# Altium PCB PCB_assembly_drawing_try2.PcbDoc (part 4 of 5)
Units mm, origin at the board's own origin, x right, y up, seen from the top; angles counter-clockwise.
Board outline 187.5 x 240 mm, 2 copper layers (Top Layer, Bottom Layer), stack 2.8 mm thick; 485 components, 419 nets, 1569 pads, 683 vias.
Unrouted connection lines stored in the file: 11.
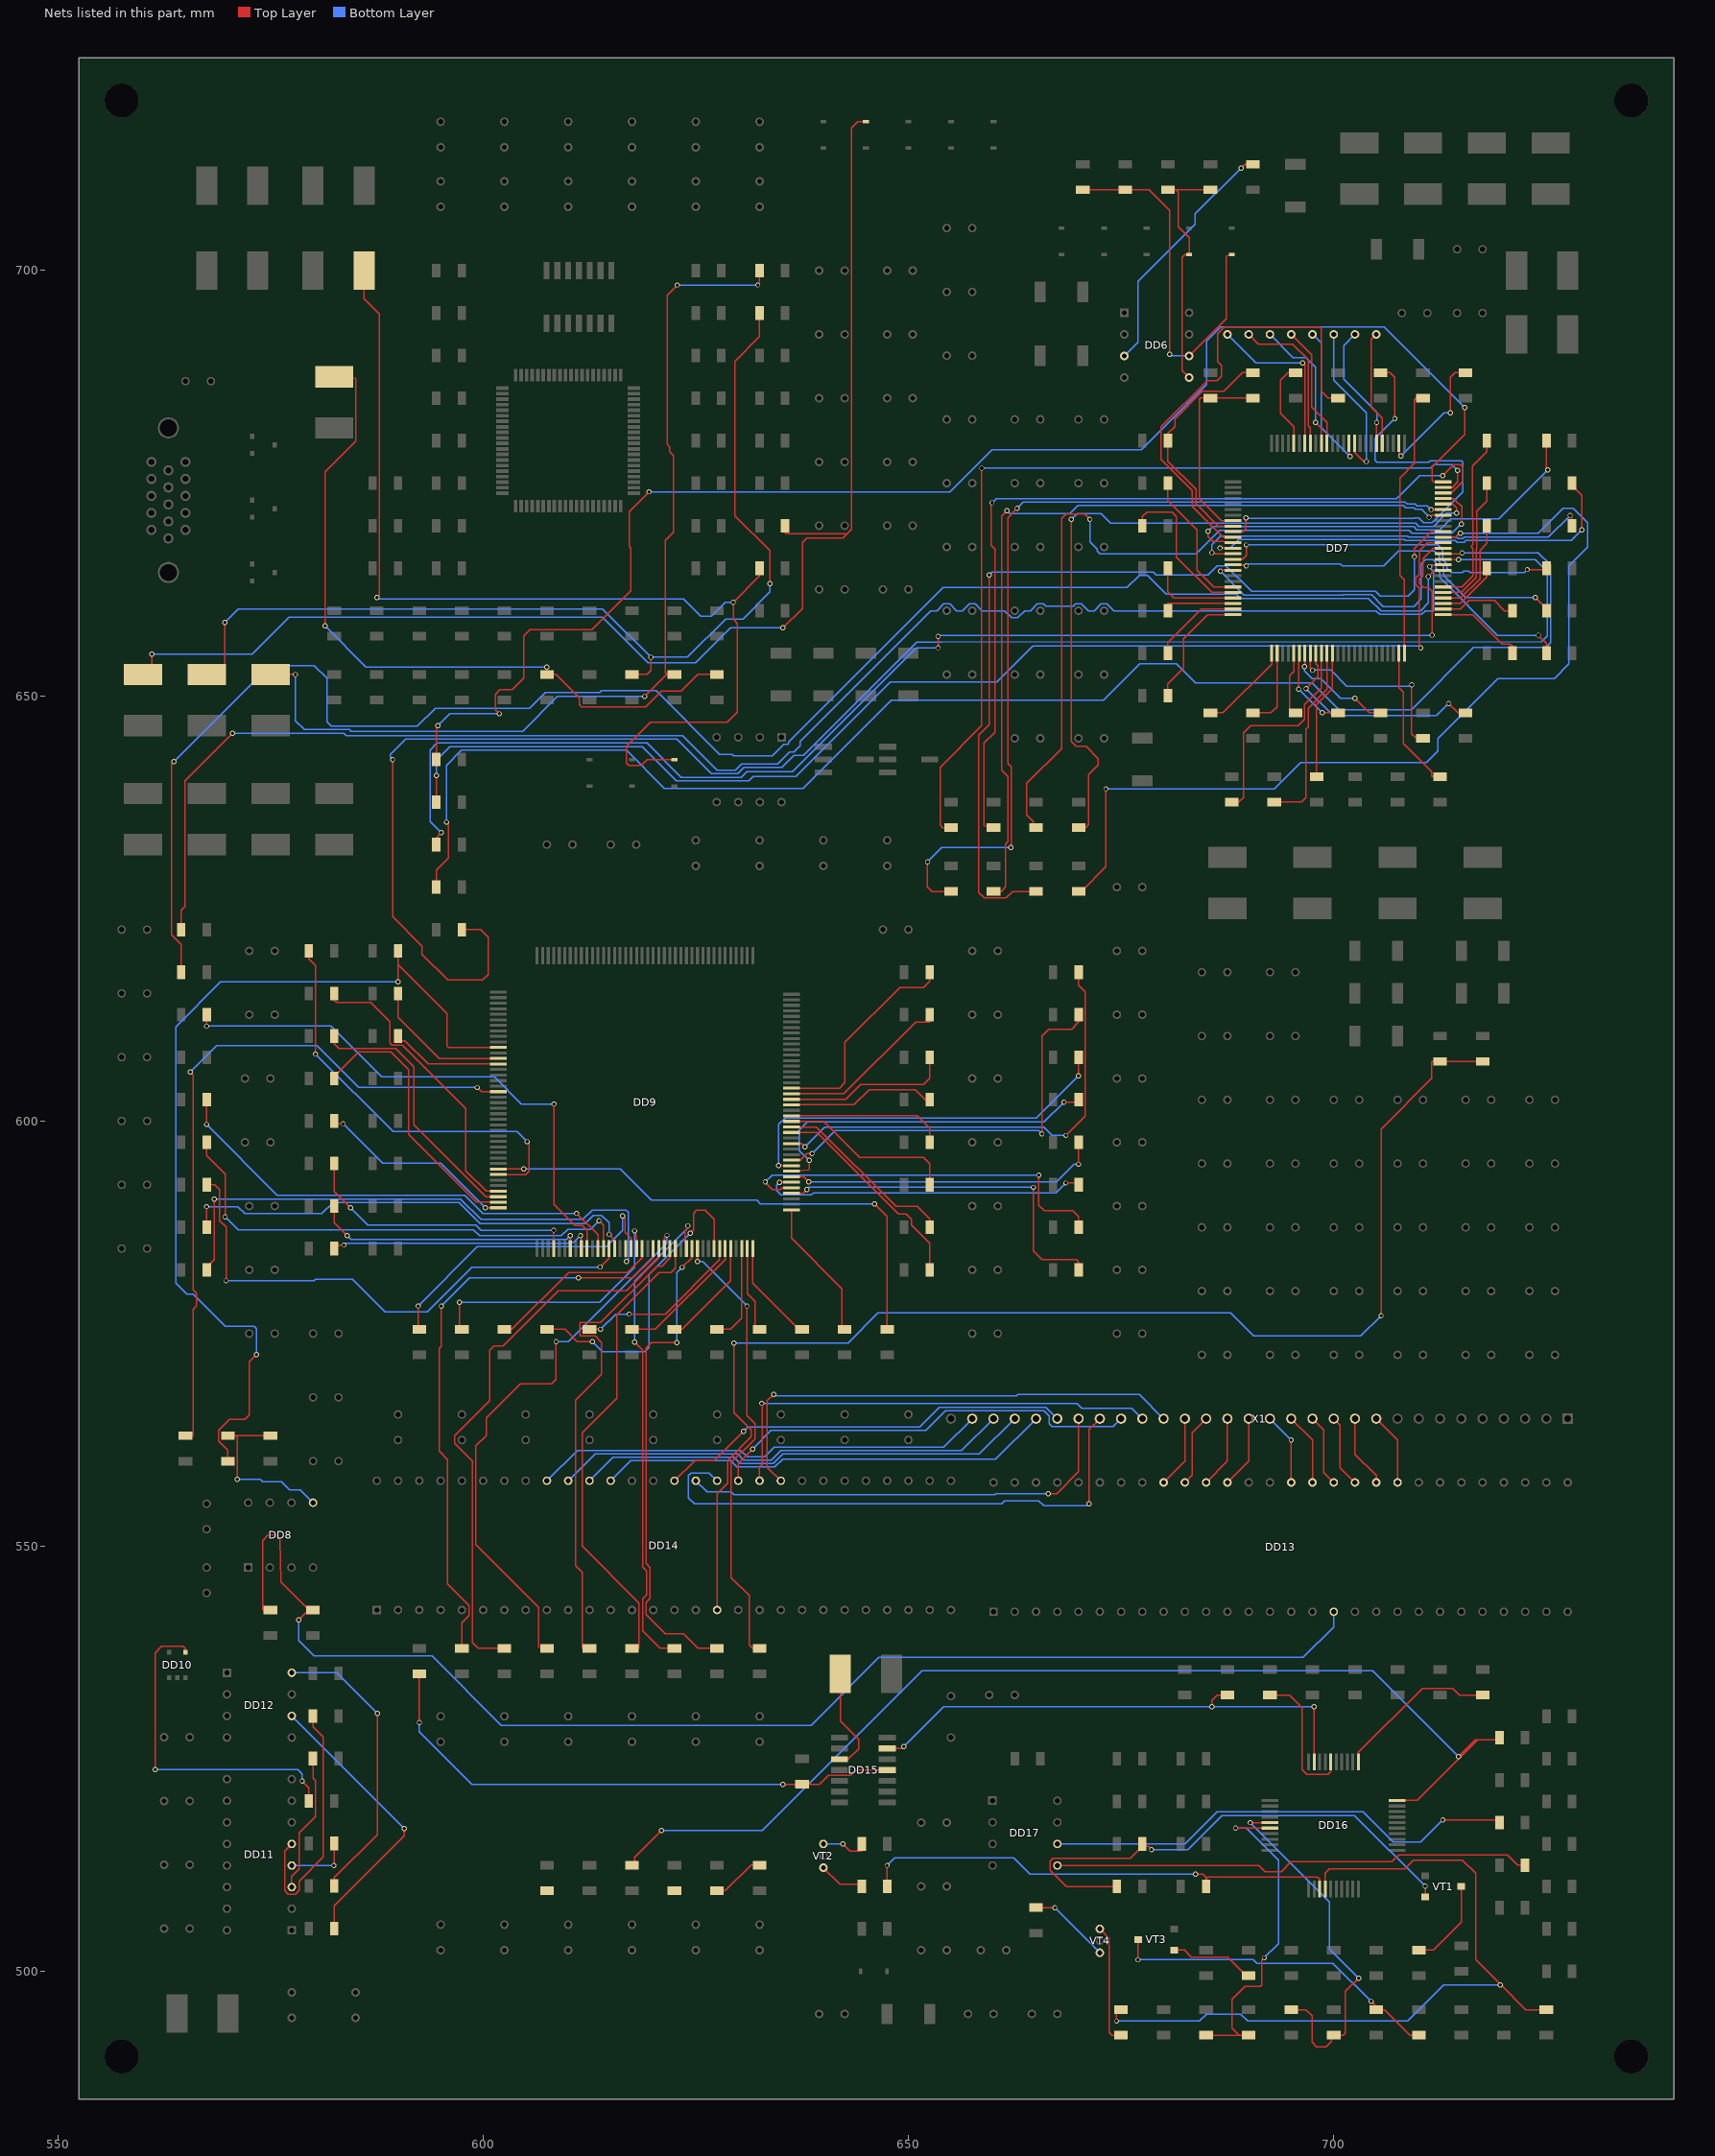
[diagram p4: the nets of this part, all layers, seen from the top]

## Via types
v1: diameter 0.6, hole 0.4, Top Layer to Bottom Layer, 677 vias
v2: diameter 0.5, hole 0.4, Top Layer to Bottom Layer, 3 vias
v3: diameter 0.4, hole 0.4, Top Layer to Bottom Layer, 2 vias
v4: diameter 0.6, hole 0.3, Top Layer to Bottom Layer, 1 vias

## Nets (pads, with @x,y where several pads share a name; then routed paths per layer and width w, separated by ;. In a path a pad name is that pad's centre, name@x,y a point inside that pad or via, vN(x,y) a via of type N, cw(c..) or ccw(c..) an arc to the next point about the centre after c; other vN are vias at no path point) (continued)
NetDD6_3: DD6.3 R49.2 | length 29.4
  Top Layer w0.15: v1(689.102,712.038) 689.564,712.5 R49.2@690.5,712.5
  Bottom Layer w0.15: DD6.3@675.38,689.96 677.012,691.592 677.012,698.736 683.725,705.449 683.725,706.661 v1(689.102,712.038)
NetDD6_5: DD6.5 R51.1 R53.2 VD13.2 | length 28.7
  Top Layer w0.15: R51.1@680.5,709.5 681.482,709.5 ; DD6.5@683,687.42 682.168,688.252 682.168,701.57 682.498,701.9 VD13.2@683,701.9 683,703.891 681.736,705.155 681.736,709.246 681.482,709.5 ; R53.2@685.5,709.5 681.482,709.5
NetDD6_6: DD6.6 R50.1 R52.2 VD12.2 | length 44.7
  Top Layer w0.15: R52.2@670.5,709.5 R50.1@675.5,709.5 678.28,709.5 680.695,707.085 v1(680.695,690.143) ; DD6.6@683,689.96 687.375,694.335 687.375,701.697 VD12.2@688,701.9
  Bottom Layer w0.15: v1(680.695,690.143) 680.878,689.96 DD6.6@683,689.96
NetDD7_8: DD7.8 R56.1 R62.2 | length 22.2
  Top Layer w0.15: R56.1@685.5,685 684.323,685 684.2,684.877 684.2,674.456 684.195,674.451 684.195,673.198 686.793,670.6 DD7.8@688.15,670.6 ; 686.325,685 R62.2@690.5,685
NetDD7_9: DD7.9 R57.1 R62.1 | length 28.6
  Top Layer w0.15: DD7.9@688.15,669.95 686.434,669.95 683.791,672.593 683.791,674.283 680.5,677.574 R57.1@680.5,680 680.5,680.845 681.314,681.659 681.314,682.562 684.552,685.8 687.08,685.8 689.28,688 R62.1@690.5,688
NetDD7_10: DD7.10 R73.1 | length 57
  Top Layer w0.15: DD7.10@688.15,669.3 689.356,669.3 689.686,669.63 v1(689.686,670.916) ; R73.1@705.5,688 706.628,688 707.187,687.441 v1(707.187,682.6)
  Bottom Layer w0.15: v1(689.686,670.916) 689.731,670.871 709.419,670.871 709.464,670.916 709.958,670.916 710.54,670.334 711.559,670.334 715.188,673.963 715.188,677.463 715.01,677.641 711.355,677.641 711.158,677.443 705.104,677.443 704.85,677.697 704.85,680.263 v1(707.187,682.6)
NetDD7_11: DD7.11 R72.1 | length 54.1
  Top Layer w0.15: DD7.11@688.15,668.65 686.982,668.65 683.387,672.245 683.387,674.116 679.704,677.799 679.704,681.634 685.14,687.07 686.308,687.07 686.816,687.578 686.816,688.848 686.359,689.305 686.359,692.582 687.121,693.344 698.348,693.344 698.551,693.141 698.551,685.8 699.351,685 R72.1@700.5,685
NetDD7_12: DD7.12 R71.1 | length 50.5
  Top Layer w0.15: v1(685.216,669.338) 685.216,668.74 685.8,668.155 687.1,668.155 DD7.12@688.15,668 ; R71.1@725,680 725,676.699 v1(725.145,676.554)
  Bottom Layer w0.15: v1(685.216,669.338) 685.76,669.883 709.422,669.883 709.779,669.526 712.467,669.526 713.774,670.833 719.424,670.833 v1(725.145,676.554)
NetDD7_13: DD7.13 R70.1 | length 51.2
  Top Layer w0.15: v1(686.621,667.385) 686.656,667.35 DD7.13@688.15,667.35 ; R70.1@728,675 728,674.776 729.183,673.593 v1(729.183,669.519)
  Bottom Layer w0.15: v1(686.621,667.385) 687.807,667.385 688.818,668.397 708.285,668.397 708.407,668.274 714.265,668.274 714.472,668.067 715.328,668.067 715.535,668.274 727.939,668.274 v1(729.183,669.519)
NetDD7_14: DD7.14 R69.1 | length 48.6
  Top Layer w0.15: v1(685.673,666.826) 685.799,666.7 DD7.14@688.15,666.7 ; v1(727.786,671.22) 728,671.007 R69.1@728,670
  Bottom Layer w0.15: v1(685.673,666.826) 685.673,667.766 686.708,668.801 708.689,668.801 708.811,668.678 714.432,668.678 714.639,668.471 715.161,668.471 715.368,668.678 725.244,668.678 v1(727.786,671.22)
NetDD7_15: DD7.15 R68.1 | length 41.1
  Top Layer w0.15: DD7.15@688.15,666.05 689.266,666.05 689.712,666.496 v1(689.712,667.741) ; v1(722.757,664.845) 725,664.845 R68.1@725,665
  Bottom Layer w0.15: v1(689.712,667.741) 712.216,667.741 712.826,667.131 712.826,666.035 713.334,665.527 713.334,664.972 713.842,664.464 715.099,664.464 715.314,664.679 715.84,664.679 716.055,664.464 722.376,664.464 v1(722.757,664.845)
NetDD7_16: DD7.16 R67.1 | length 41.9
  Top Layer w0.15: DD7.16@688.15,665.4 689.588,665.4 v1(689.712,665.277) ; v1(723.679,661.568) 725,660.248 R67.1@725,660
  Bottom Layer w0.15: v1(689.712,665.277) 689.962,665.528 700.759,665.528 701.01,665.277 705.891,665.277 707.644,667.029 711.81,667.029 712.398,666.441 712.398,665.738 712.902,665.235 712.902,664.159 715.493,661.568 v1(723.679,661.568)
NetDD7_17: DD7.17 R66.1 | length 52.3
  Top Layer w0.15: v1(686.664,664.642) 686.772,664.75 DD7.17@688.15,664.75 ; v1(724.06,657.123) 725,656.184 R66.1@725,655
  Bottom Layer w0.15: v1(686.664,664.642) 689.442,661.863 701.095,661.863 701.102,661.87 704.447,661.87 705.815,660.502 709.422,660.502 710.286,661.365 710.286,665.48 710.794,665.988 711.655,665.988 711.994,665.648 711.994,664.996 712.477,664.513 712.477,663.912 719.266,657.123 v1(724.06,657.123)
NetDD7_20: DD7.20 R89.1 | length 16.7
  Top Layer w0.15: R89.1@680.5,675 680.5,672.922 683.936,669.486 683.936,664.765 685.901,662.8 DD7.20@688.15,662.8
NetDD7_21: DD7.21 R88.1 | length 18.6
  Top Layer w0.15: R88.1@677.5,670 677.5,671.068 678.033,671.601 680.974,671.601 681.507,671.068 681.507,666.316 685.673,662.15 DD7.21@688.15,662.15
NetDD7_22: DD7.22 R87.1 | length 10.7
  Top Layer w0.15: R87.1@680.5,665 680.5,662.228 681.228,661.5 DD7.22@688.15,661.5
NetDD7_23: DD7.23 R86.1 | length 8.5
  Top Layer w0.15: R86.1@680.5,660 680.5,660.85 DD7.23@688.15,660.85
NetDD7_24: DD7.24 R85.1 | length 10.5
  Top Layer w0.15: R85.1@680.5,655 680.5,656.26 684.44,660.2 DD7.24@688.15,660.2
NetDD7_25: DD7.25 R84.1 | length 14.5
  Top Layer w0.15: R84.1@680.5,650 680.5,651.408 682.346,653.254 682.346,656.705 685.19,659.55 DD7.25@688.15,659.55
NetDD7_26: DD7.26 R83.1 | length 10.8
  Top Layer w0.15: R83.1@685.5,648 686.968,648 692.7,653.732 DD7.26@692.7,655
NetDD7_27: DD7.27 R82.1 | length 9.4
  Top Layer w0.15: R82.1@690.5,648 692.634,648 693.35,648.716 DD7.27@693.35,655
NetDD7_30: DD7.30 R107.1 | length 7.9
  Top Layer w0.15: DD7.30@695.3,655 695.3,652.884 694.798,652.382 694.798,648 R107.1@695.5,648
NetDD7_31: DD7.31 R106.1 | length 10
  Top Layer w0.15: v1(695.864,650.767) 695.864,653.958 695.95,654.044 DD7.31@695.95,655 ; v1(698.632,648) R106.1@700.5,648
  Bottom Layer w0.15: v1(695.864,650.767) v1(698.632,648)
NetDD7_32: DD7.32 R105.1 | length 13.1
  Top Layer w0.15: v1(696.57,653.415) 696.6,653.445 DD7.32@696.6,655 ; v1(702.488,649.709) 704.196,648 R105.1@705.5,648
  Bottom Layer w0.15: v1(696.57,653.415) 696.57,652.925 697.484,652.01 698.477,652.01 700.779,649.709 v1(702.488,649.709)
NetDD7_33: DD7.33 R104.1 | length 21.9
  Top Layer w0.15: DD7.33@697.25,655 697.25,653.268 v1(697.509,653.009) ; v1(709.168,651.281) 709.168,645.508 709.676,645 R104.1@710.5,645
  Bottom Layer w0.15: v1(697.509,653.009) 699.674,653.009 701.548,651.135 709.022,651.135 v1(709.168,651.281)
NetDD7_34: DD7.34 R103.1 | length 26
  Top Layer w0.15: v1(696.747,650.824) 698.144,652.221 698.144,653.526 697.9,653.771 DD7.34@697.9,655 ; v1(713.511,649.097) 714.608,648 R103.1@715.5,648
  Bottom Layer w0.15: v1(696.747,650.824) 699.922,647.649 712.064,647.649 v1(713.511,649.097)
NetDD7_35: DD7.35 R102.1 | length 25.7
  Top Layer w0.15: R102.1@688,637.5 688.859,637.5 689.407,638.048 689.407,645.668 690.22,646.481 695.838,646.481 696.584,647.226 696.584,648.947 698.55,650.913 DD7.35@698.55,655
NetDD7_36: DD7.36 R101.1 | length 21.9
  Top Layer w0.15: R101.1@693,637.5 696.199,637.5 696.747,638.048 696.747,646.097 696.988,646.338 696.988,648.543 699.2,650.755 DD7.36@699.2,655
NetDD7_37: DD7.37 R100.1 | length 15.3
  Top Layer w0.15: R100.1@698,640.5 697.992,640.5 697.992,648.961 699.85,650.819 DD7.37@699.85,655
NetDD7_49: DD7.49 R97.1 | length 17.1
  Top Layer w0.15: DD7.49@707.65,655 707.65,650.973 708.203,650.42 708.203,644.404 711.522,641.085 711.522,640.5 R97.1@712.5,640.5
NetDD7_50: DD7.50 R96.1 | length 31.8
  Top Layer w0.15: DD7.50@708.3,655 708.3,663.615 707.782,664.133 707.782,675.625 709.498,677.342 709.498,684.822 709.676,685 R96.1@710.5,685
NetDD7_51: DD7.51 R95.1 | length 10.5
  Top Layer w0.15: DD7.51@712.85,659.55 716.368,659.55 719.811,656.107 720.721,656.107 721,655.828 R95.1@721,655
NetDD7_52: DD7.52 R94.1 | length 9.1
  Top Layer w0.15: DD7.52@712.85,660.2 714.908,660.2 715.896,661.187 718.896,661.187 720.084,660 R94.1@721,660
NetDD7_53: DD7.53 R93.1 | length 7.5
  Top Layer w0.15: DD7.53@712.85,660.85 714.894,660.85 718,663.956 R93.1@718,665
NetDD7_54: DD7.54 R92.1 | length 11.8
  Top Layer w0.15: DD7.54@712.85,661.5 714.916,661.5 717.183,663.767 717.183,667.094 718,667.911 R92.1@718,670
NetDD7_55: DD7.55 R91.1 | length 16.2
  Top Layer w0.15: DD7.55@712.85,662.15 714.994,662.15 716.779,663.934 716.779,667.274 716.813,667.309 716.813,671.703 718,672.89 R91.1@718,675
NetDD7_56: DD7.56 R90.1 | length 20.9
  Top Layer w0.15: DD7.56@712.85,662.8 715.073,662.8 716.375,664.102 716.375,667.315 716.191,667.498 716.191,667.601 716.383,667.793 716.383,670.731 716.305,670.809 716.305,677.019 718,678.713 R90.1@718,680
NetDD7_59: DD7.59 R81.1 | length 204.5
  Top Layer w0.15: v1(563.651,642.264) 563.372,641.985 563.372,621.904 564.5,620.776 R81.1@564.5,617.5 ; v1(711.098,664.007) 711.842,664.75 DD7.59@712.85,664.75
  Bottom Layer w0.15: v1(563.651,642.264) 574.954,653.567 580.136,653.567 581.635,652.069 581.635,646.963 582.168,646.43 592.277,646.43 594.385,648.538 605.46,648.538 607.289,650.367 613.715,650.367 613.943,650.596 620.344,650.596 627.812,643.128 629.273,643.128 629.451,642.95 634.009,642.95 635.33,644.271 635.787,644.271 635.914,644.398 635.914,644.55 654.075,662.711 675.691,662.711 677.133,664.153 678.129,664.153 680.308,661.975 688.543,661.975 689.059,661.459 701.263,661.459 701.269,661.466 704.088,661.466 705.56,659.994 710.184,659.994 711.098,660.908 v1(711.098,664.007)
NetDD7_60: DD7.60 R80.1 | length 187.8
  Top Layer w0.15: R80.1@564.5,622.5 564.5,624.749 564.972,625.221 564.972,640.029 v1(570.535,645.592) ; v1(711.276,665.193) 711.483,665.4 DD7.60@712.85,665.4
  Bottom Layer w0.15: v1(570.535,645.592) 583.616,645.592 583.893,645.315 623.443,645.315 627.529,641.229 629.638,641.229 630.371,641.962 634.594,641.962 636.042,643.41 636.523,643.41 637.257,644.144 637.257,644.625 652.632,660 653.328,660 654.157,660.829 654.843,660.829 655.672,660 656.328,660 657.157,660.829 657.843,660.829 658.672,660 661.328,660 662.157,659.171 662.843,659.171 663.672,660 664.328,660 665.157,660.829 665.843,660.829 666.143,660.529 669.357,660.529 669.657,660.829 670.343,660.829 671.172,660 671.828,660 672.657,660.829 673.343,660.829 674.172,660 704.982,660 705.393,659.59 710.351,659.59 710.762,660 711.668,660 711.729,659.938 711.729,664.592 711.276,665.045 v1(711.276,665.193)
NetDD7_61: DD7.61 R79.1 | length 207.6
  Top Layer w0.15: v1(589.356,642.493) 589.356,624.015 592.836,620.535 592.836,619.608 595.861,616.583 599.948,616.583 600.583,617.218 600.583,621.614 599.694,622.503 597.5,622.503 R79.1@597.5,622.5 ; DD7.61@712.85,666.05 714.158,666.013 v1(714.654,666.013)
  Bottom Layer w0.15: v1(589.356,642.493) 589.102,642.747 589.102,643.103 590.91,644.911 622.755,644.911 626.84,640.825 629.938,640.825 630.671,641.558 635.106,641.558 636.554,643.006 637.674,643.006 650.974,656.306 653.985,656.306 724.408,656.387 725.088,657.067 725.088,664.597 723.671,666.013 v1(714.654,666.013)
NetDD7_62: DD7.62 R78.1 | length 181.5
  Top Layer w0.15: R78.1@594.5,627.5 594.5,629.527 595.909,630.936 595.909,634.898 v1(595.681,635.127) ; DD7.62@712.85,666.7 715.008,666.7 v1(715.092,666.784)
  Bottom Layer w0.15: v1(595.681,635.127) 595.681,641.829 597.463,643.611 616.839,643.611 621.329,639.121 637.597,639.121 647.979,649.503 672.897,649.503 677.189,653.796 681.482,653.796 683.768,651.51 697.459,651.51 700.634,648.335 709.117,648.335 716.441,655.659 724.916,655.659 725.492,656.235 725.492,665.387 724.002,666.877 723.909,666.784 v1(715.092,666.784)
NetDD7_63: DD7.63 R77.1 | length 152.4
  Top Layer w0.15: R77.1@594.5,632.5 594.5,633.311 v1(595.097,633.908) ; v1(653.491,655.65) v1(653.491,656.996) ; v1(711.556,657.123) 711.556,662.292 711.123,662.724 710.567,662.724 710.04,663.251 710.04,663.689 710.469,664.119 710.469,665.554 710.506,665.59 710.506,666.148 711.708,667.35 DD7.63@712.85,667.35
  Bottom Layer w0.15: v1(595.097,633.908) 593.776,635.229 593.776,643.636 594.589,644.449 619.255,644.449 623.283,640.421 630.342,640.421 630.993,641.072 636.353,641.072 650.931,655.65 v1(653.491,655.65) ; v1(653.491,656.996) 653.618,657.123 v1(711.556,657.123)
NetDD7_64: DD7.64 R76.1 | length 144.7
  Top Layer w0.15: R76.1@594.5,637.5 v1(594.5,640.613) ; v1(710.235,655.625) 710.065,655.794 710.065,662.654 709.636,663.084 709.636,663.857 710.065,664.286 710.065,665.994 710.102,666.03 710.102,667.105 710.997,668 DD7.64@712.85,668
  Bottom Layer w0.15: v1(594.5,640.613) 594.5,642.43 596.087,644.017 618.698,644.017 622.698,640.017 631.222,640.017 631.714,640.509 636.743,640.509 647.871,651.637 660.4,651.637 664.642,655.879 709.981,655.879 v1(710.235,655.625)
NetDD7_65: DD7.65 R75.1 | length 111.7
  Top Layer w0.15: R75.1@670,627 670.332,627 673.227,629.895 v1(673.227,639.064) ; DD7.65@712.85,668.65 714.35,668.65 714.9,669.2 v1(714.9,669.1)
  Bottom Layer w0.15: v1(673.227,639.064) 693.01,639.064 696.084,642.137 710.87,642.137 712.216,643.484 712.216,644.982 719.277,652.043 725.932,652.043 727.634,653.745 727.634,665.302 729.818,667.487 729.818,670.382 728.167,672.033 726.968,672.033 724.035,669.1 v1(714.9,669.1)
NetDD7_66: DD7.66 R74.1 | length 106.7
  Top Layer w0.15: v1(659.511,664.21) 659.511,646.582 658.266,645.338 658.266,626.872 658.927,626.212 661.466,626.212 662.254,627 R74.1@665,627 ; v1(709.473,666.369) 709.473,667.309 711.464,669.3 DD7.66@712.85,669.3
  Bottom Layer w0.15: v1(659.511,664.21) 659.858,664.557 678.787,664.557 679.134,664.21 685.241,664.21 686.308,665.277 687.324,665.277 690.334,662.267 700.928,662.267 700.935,662.274 704.907,662.274 705.46,661.721 708.762,661.721 709.473,662.432 v1(709.473,666.369)
NetDD7_69: DD7.69 R65.1 | length 99.1
  Top Layer w0.15: R65.1@660,627 660.908,627 661.422,627.514 661.422,632.564 661.67,632.812 661.67,640.537 660.984,641.223 660.984,671.17 v1(661.594,671.779) ; v1(711.199,670.999) 711.334,670.999 711.585,671.25 DD7.69@712.85,671.25
  Bottom Layer w0.15: v1(661.594,671.779) 661.949,671.424 668.96,671.424 669.928,672.392 707.748,672.392 707.752,672.396 708.179,672.396 708.446,672.129 709.419,672.129 709.619,671.929 710.339,671.929 711.199,671.069 v1(711.199,670.999)
NetDD7_70: DD7.70 R64.1 | length 107.7
  Top Layer w0.15: v1(652.247,630.479) 652.247,627.533 652.78,627 R64.1@655,627 ; v1(662.051,632.155) 662.074,632.178 662.074,641.632 661.67,642.036 661.67,670.941 v1(662.788,672.059) ; v1(711.46,671.9) DD7.70@712.85,671.9
  Bottom Layer w0.15: v1(652.247,630.479) 653.923,632.155 v1(662.051,632.155) ; v1(662.788,672.059) 663.525,672.796 707.581,672.796 707.585,672.8 708.347,672.8 708.614,672.533 709.586,672.533 709.786,672.333 711.027,672.333 v1(711.46,671.9)
NetDD7_71: DD7.71 R63.1 | length 88.9
  Top Layer w0.15: v1(669.138,670.738) 669.138,644.652 669.722,644.068 670.865,644.068 672.313,642.62 672.313,641.858 671.17,640.715 671.17,634.856 670.814,634.5 R63.1@670,634.5 ; DD7.71@712.85,672.55 713.994,672.55 714.426,672.118 v1(714.426,671.474)
  Bottom Layer w0.15: v1(669.138,670.738) 669.851,671.451 672.616,671.451 673.781,670.287 709.627,670.287 709.983,669.93 711.73,669.93 713.274,671.474 v1(714.426,671.474)
NetDD7_72: DD7.72 R61.1 | length 96.3
  Top Layer w0.15: R61.1@665,634.5 664.693,634.5 664.693,635.203 663.905,635.991 663.905,639.699 667.995,643.788 667.995,670.853 668.509,671.367 670.718,671.367 v1(671.322,670.763) ; DD7.72@712.85,673.2 714.1,673.2 714.471,672.829 714.471,672.781 714.781,672.471 714.829,672.471 715.055,672.245 715.055,670.307 714.934,670.186 715.086,670.186 715.074,670.199 v1(714.999,670.199)
  Bottom Layer w0.15: v1(671.322,670.763) 671.322,668.081 672.171,667.232 672.171,667.004 672.504,666.671 683.791,666.671 686.562,669.442 708.855,669.442 709.175,669.122 713.851,669.122 714.929,670.2 714.931,670.199 v1(714.999,670.199)
NetDD7_73: DD7.73 R60.1 | length 101.8
  Top Layer w0.15: v1(659.816,672.694) 659.714,672.694 659.714,667.69 660.146,667.258 660.146,645.719 658.901,644.474 658.901,634.729 R60.1@660,634.5 ; v1(712.8,675.894) 714.096,677.189 714.902,677.189 715.182,676.91 715.182,675.19 713.842,673.85 DD7.73@712.85,673.85
  Bottom Layer w0.15: v1(659.816,672.694) 660.322,673.2 707.414,673.2 710.108,675.894 v1(712.8,675.894)
NetDD7_74: DD7.74 R58.1 | length 105.1
  Top Layer w0.15: R58.1@655,634.5 654.05,634.5 653.717,634.833 653.717,641.576 658.622,646.481 v1(658.622,676.758) ; DD7.74@712.85,674.5 713.921,674.5 714.553,675.132 v1(714.553,676.504)
  Bottom Layer w0.15: v1(658.622,676.758) 711.384,676.758 711.784,677.158 713.898,677.158 v1(714.553,676.504)
NetDD7_75: DD7.75 R55.1 | length 173.3
  Top Layer w0.15: R55.1@594.5,642.5 594.5,646.291 v1(594.69,646.481) ; v1(601.904,647.878) 601.421,648.36 601.421,650.164 601.98,650.723 603.428,650.723 604.799,652.094 604.799,657.047 605.536,657.784 612.775,657.784 617.347,662.356 617.347,667.385 617.169,667.563 617.169,671.652 v1(619.506,673.989) ; DD7.75@712.85,675.15 711.708,675.15 711.554,675.304 711.554,676.91 715.391,680.747 v1(715.391,683.895)
  Bottom Layer w0.15: v1(594.69,646.481) 596.087,647.878 v1(601.904,647.878) ; v1(619.506,673.989) 654.888,673.989 659.816,678.917 677.367,678.917 685.063,686.613 685.063,691.744 686.664,693.344 705.942,693.344 v1(715.391,683.895)
NetDD7_77: DD7.77 R54.1 | length 15.7
  Top Layer w0.15: DD7.77@707.65,679.7 707.65,678.428 v1(707.883,678.195) ; v1(713.715,683.273) 713.715,687.467 714.248,688 R54.1@715.5,688
  Bottom Layer w0.15: v1(707.883,678.195) 712.961,683.273 v1(713.715,683.273)
NetDD7_80: DD7.80 RX_D2+.1 | length 13.6
  Top Layer w0.15: RX_D2+.1@705,692.5 704.418,691.918 704.418,683.958 705.7,682.676 DD7.80@705.7,679.7
NetDD7_81: DD7.81 RX_D2-.1 | length 15
  Top Layer w0.15: DD7.81@705.05,679.7 v1(705.05,682.139)
  Bottom Layer w0.15: RX_D2-.1@702.5,692.5 701.173,691.173 701.173,687.242 705.104,683.311 705.104,682.193 v1(705.05,682.139)
NetDD7_85: DD7.85 RX_D1+.1 | length 19.4
  Top Layer w0.15: DD7.85@702.45,679.7 702.45,678.663 703.567,677.546 v1(703.846,677.546)
  Bottom Layer w0.15: RX_D1+.1@700,692.5 700,687.107 703.846,683.26 v1(703.846,677.546)
NetDD7_86: DD7.86 RX_D1-.1 | length 17.8
  Top Layer w0.15: DD7.86@701.8,679.7 701.8,678.258 v1(701.904,678.155)
  Bottom Layer w0.15: RX_D1-.1@697.5,692.5 698.508,691.492 698.508,681.55 v1(701.904,678.155)
NetDD7_90: DD7.90 RX_D0+.1 | length 14.5
  Top Layer w0.15: RX_D0+.1@695,692.5 697.408,690.092 697.408,683.96 699.2,682.168 DD7.90@699.2,679.7
NetDD7_91: DD7.91 RX_D0-.1 | length 16.2
  Top Layer w0.15: v1(697.865,682.142) 698.55,681.457 DD7.91@698.55,679.7
  Bottom Layer w0.15: RX_D0-.1@692.5,692.5 695.212,689.788 696.722,689.788 697.865,688.645 v1(697.865,682.142)
NetDD7_93: DD7.93 RX_CLK+.1 | length 18.2
  Top Layer w0.15: RX_CLK+.1@690,692.5 691.137,691.363 695.173,691.363 697.004,689.531 697.004,681.745 697.25,681.499 DD7.93@697.25,679.7
NetDD7_94: DD7.94 RX_CLK-.1 | length 19.8
  Top Layer w0.15: v1(696.346,689.151) 696.6,688.897 DD7.94@696.6,679.7
  Bottom Layer w0.15: RX_CLK-.1@687.5,692.5 690.849,689.151 v1(696.346,689.151)
NetDD7_96: DD7.96 R59.2 | length 10.2
  Top Layer w0.15: DD7.96@695.3,679.7 695.3,681.659 693.75,683.209 693.75,687.095 694.655,688 R59.2@695.5,688
NetDD8_5: DD8.5 R111.2 R117.2 | length 20.2
  Top Layer w0.15: R117.2@570,563 570.958,563 ; v1(571.094,557.86) 571.094,562.864 570.958,563 ; R111.2@575,563 570.958,563
  Bottom Layer w0.15: v1(571.094,557.86) 573.796,557.86 574.087,557.569 576.303,557.569 577.239,556.633 578.487,556.633 DD8.5@580,555.12
NetDD9_11: DD9.11 R113.1 R117.1 | length 110.8
  Top Layer w0.15: R117.1@570,560 569.976,560 569.976,561.305 568.925,562.356 568.925,563.626 570.195,564.896 571.983,564.896 572.491,565.404 572.491,571.678 v1(573.354,572.541) ; v1(590,616.356) 590,618.412 ; R113.1@590,620 590,618.412 ; DD9.11@601.8,608.65 595.945,608.65 595.757,608.838 595.757,612.654 590,618.412
  Bottom Layer w0.15: v1(573.354,572.541) 573.354,575.564 573.075,575.843 569.688,575.843 565.912,579.619 565.184,579.619 563.861,580.943 563.861,611.088 569.129,616.356 v1(590,616.356)
NetDD9_13: DD9.13 R114.1 | length 16.6
  Top Layer w0.15: R114.1@590,615 590,612.182 594.832,607.35 DD9.13@601.8,607.35
NetDD9_14: DD9.14 R115.1 | length 13.5
  Top Layer w0.15: R115.1@590,610 590,609.448 590.779,609.448 593.526,606.7 DD9.14@601.8,606.7
NetDD9_19: DD9.19 R118.1 | length 83.9
  Top Layer w0.15: R118.1@565,563 565.899,563 565.899,577.854 566.318,578.273 566.318,579.754 565.899,580.173 565.899,605.447 v1(565.582,605.765) ; v1(599.313,603.936) 599.799,603.45 DD9.19@601.8,603.45
  Bottom Layer w0.15: v1(565.582,605.765) 568.681,608.863 580.466,608.863 585.394,603.936 v1(599.313,603.936)
NetDD9_33: DD9.33 R130.2 | length 61.3
  Top Layer w0.15: DD9.33@601.8,594.35 v1(604.78,594.35) ; v1(646.015,590.254) 647.497,588.772 647.497,575.5 R130.2@647.5,575.5
  Bottom Layer w0.15: v1(604.78,594.35) 616.108,594.35 619.779,590.679 632.172,590.679 632.597,590.254 v1(646.015,590.254)
NetDD9_34: DD9.34 R129.2 | length 49
  Top Layer w0.15: R129.2@579.5,620 579.5,619.075 580.288,618.287 v1(580.288,607.873) ; DD9.34@601.8,593.7 605.028,593.7 605.409,594.081 605.409,597.332 v1(605.18,597.56)
  Bottom Layer w0.15: v1(580.288,607.873) 589.415,598.746 603.995,598.746 v1(605.18,597.56)
NetDD9_37: DD9.37 R168.2 | length 35.2
  Top Layer w0.15: R168.2@582.5,615 582.5,614.172 582.754,613.918 586.793,613.918 589.015,611.696 589.015,609.19 589.28,608.925 590.514,608.925 597.941,601.497 597.941,594.163 600.354,591.75 DD9.37@601.8,591.75
NetDD9_38: DD9.38 R167.2 | length 31.6
  Top Layer w0.15: R167.2@582.5,610 582.5,609.092 583.071,608.521 589.699,608.521 591.858,606.361 591.858,599.571 600.329,591.1 DD9.38@601.8,591.1
NetDD9_39: DD9.39 R166.2 | length 32.5
  Top Layer w0.15: R166.2@582.5,605 582.5,605.258 585.359,608.117 589.163,608.117 591.247,606.033 591.247,598.415 599.211,590.45 DD9.39@601.8,590.45
NetDD9_40: DD9.40 R165.2 | length 23.7
  Top Layer w0.15: R165.2@582.5,600 582.5,599.694 v1(583.54,599.694) ; v1(600.252,589.8) DD9.40@601.8,589.8
  Bottom Layer w0.15: v1(583.54,599.694) 588.213,595.02 595.032,595.02 v1(600.252,589.8)
NetDD9_44: DD9.44 R164.2 | length 33.1
  Top Layer w0.15: R164.2@582.5,595 582.5,591.717 v1(584.429,589.788) ; DD9.44@608.3,585 v1(608.3,587.167)
  Bottom Layer w0.15: v1(584.429,589.788) 586.452,587.764 599.139,587.764 599.737,587.167 v1(608.3,587.167)
NetDD9_47: DD9.47 R163.2 | length 32.2
  Top Layer w0.15: R163.2@582.5,590 582.5,588.059 v1(584.022,586.537) ; DD9.47@610.25,585 v1(610.25,586.537)
  Bottom Layer w0.15: v1(584.022,586.537) 584.475,586.084 609.797,586.084 v1(610.25,586.537)
NetDD9_49: DD9.49 R162.2 | length 31.4
  Top Layer w0.15: R162.2@582.5,585 582.5,585.419 v1(583.641,585.419) ; v1(611.454,586.537) 611.55,586.441 DD9.49@611.55,585
  Bottom Layer w0.15: v1(583.641,585.419) 583.859,585.637 609.998,585.637 610.073,585.713 610.63,585.713 v1(611.454,586.537)
NetDD9_50: DD9.50 R161.2 | length 65.1
  Top Layer w0.15: v1(567.5,611.149) R161.2@567.5,612.5 ; v1(608.33,602.005) 608.33,590.169 610.794,587.705 611.632,587.705 612.2,587.137 DD9.50@612.2,585
  Bottom Layer w0.15: v1(567.5,611.149) 582.117,611.149 588.086,605.18 601.332,605.18 604.507,602.005 v1(608.33,602.005)
NetDD9_52: DD9.52 R160.2 | length 55.9
  Top Layer w0.15: v1(567.5,599.592) R160.2@567.5,602.5 ; v1(610.985,589.14) 613.5,586.625 DD9.52@613.5,585
  Bottom Layer w0.15: v1(567.5,599.592) 575.806,591.287 597.814,591.287 599.961,589.14 v1(610.985,589.14)
NetDD9_53: DD9.53 R159.2 | length 58.8
  Top Layer w0.15: R159.2@567.5,597.5 567.5,595.922 569.661,593.761 v1(569.661,588.732) ; v1(613.613,588.289) 614.15,587.753 DD9.53@614.15,585
  Bottom Layer w0.15: v1(569.661,588.732) 571.195,587.197 598.881,587.197 599.567,586.511 609.194,586.511 609.956,587.273 612.597,587.273 v1(613.613,588.289)
NetDD9_54: DD9.54 R158.2 | length 63.2
  Top Layer w0.15: R158.2@567.5,592.5 567.5,592.506 568.452,592.506 569.032,591.926 569.032,588.264 569.773,587.523 v1(569.773,581.203) ; v1(613.74,582.828) 614.8,583.888 DD9.54@614.8,585
  Bottom Layer w0.15: v1(569.773,581.203) 580.128,581.203 580.309,581.384 584.629,581.384 588.476,577.537 593.412,577.537 598.703,582.828 v1(613.74,582.828)
NetDD9_55: DD9.55 R157.2 | length 55.7
  Top Layer w0.15: R157.2@567.5,587.5 v1(567.5,589.934) ; v1(614.807,586.664) 615.45,586.021 DD9.55@615.45,585
  Bottom Layer w0.15: v1(567.5,589.934) 571.173,589.934 572.006,589.102 581.05,589.102 582.371,590.423 597.133,590.423 599.628,587.928 611.994,587.928 612.984,588.918 613.918,588.918 614.807,588.029 v1(614.807,586.664)
NetDD9_57: DD9.57 R156.2 | length 66.4
  Top Layer w0.15: R156.2@567.5,582.5 567.5,582.803 568.376,583.679 v1(568.376,590.829) ; DD9.57@616.75,585 616.75,583.578 v1(616.864,583.463)
  Bottom Layer w0.15: v1(568.376,590.829) 597.35,590.829 599.757,588.422 611.723,588.422 612.834,589.534 616.816,589.534 617.07,589.28 617.07,583.669 v1(616.864,583.463)
NetDD9_58: DD9.58 R155.2 | length 36.6
  Top Layer w0.15: v1(592.353,578.256) 592.353,575.5 R155.2@592.5,575.5 ; v1(616.394,588.837) 616.7,588.531 616.7,586.904 617.4,586.204 DD9.58@617.4,585
  Bottom Layer w0.15: v1(592.353,578.256) 599.33,585.233 614.498,585.233 616.394,587.129 v1(616.394,588.837)
NetDD9_59: DD9.59 R154.2 | length 32.2
  Top Layer w0.15: v1(597.205,578.687) 597.205,575.5 R154.2@597.5,575.5 ; v1(617.804,587.07) 618.05,586.405 DD9.59@618.05,585
  Bottom Layer w0.15: v1(597.205,578.687) 613.682,578.687 617.804,582.809 v1(617.804,587.07)
NetDD9_60: DD9.60 R153.2 | length 20.8
  Top Layer w0.15: R153.2@602.5,575.5 603.352,575.5 610.052,582.199 616.972,582.199 618.7,583.927 DD9.60@618.7,585
NetDD9_62: DD9.62 R152.2 | length 70.5
  Top Layer w0.15: v1(595.097,578.231) 595.097,573.507 594.843,573.253 594.843,561.177 595.833,560.187 595.833,545.548 598.329,543.052 598.329,541.83 597.484,540.985 597.484,538 R152.2@597.5,538 ; v1(611.194,581.552) 617.606,581.552 620,583.946 DD9.62@620,585
  Bottom Layer w0.15: v1(595.097,578.231) 598.418,581.552 v1(611.194,581.552)
NetDD9_63: DD9.63 R151.2 | length 66.4
  Top Layer w0.15: R151.2@602.5,538 599.44,538 598.733,538.707 598.733,560.015 596.671,562.077 596.671,563.027 600.786,567.142 600.786,573.024 601.294,573.532 602.323,573.532 608.838,580.047 616.84,580.047 620.65,583.857 DD9.63@620.65,585
NetDD9_64: DD9.64 R150.2 | length 66.5
  Top Layer w0.15: R150.2@607.5,538 606.552,538.127 606.552,542.823 599.161,550.215 599.161,561.81 600.366,563.016 600.366,565.086 604.365,569.085 608.076,569.085 608.584,569.593 v1(608.584,574.04) ; DD9.64@621.3,585 621.3,586.248 v1(621.614,586.562)
  Bottom Layer w0.15: v1(608.584,574.04) 610.015,574.04 621.614,585.639 v1(621.614,586.562)
NetDD9_65: DD9.65 R149.2 | length 57.6
  Top Layer w0.15: R149.2@612.5,538 611.632,538 611.632,546.938 610.845,547.726 610.845,567.169 613.906,570.23 613.906,573.961 613.156,574.711 611.403,574.711 611.403,576.301 613.804,576.301 620.44,582.937 621.011,582.937 621.95,583.875 DD9.65@621.95,585
NetDD9_66: DD9.66 R148.2 | length 56
  Top Layer w0.15: R148.2@617.5,538 618.338,538 618.338,543.331 611.657,550.012 611.657,563.347 615.696,567.385 615.696,577.19 620.674,582.168 622.092,582.168 622.6,582.676 DD9.66@622.6,585
NetDD9_68: DD9.68 R147.2 | length 58.4
  Top Layer w0.15: v1(617.804,573.989) 618.744,573.049 618.744,547.563 619.221,547.086 619.221,544.294 618.744,543.818 618.744,540.032 620.776,538 R147.2@622.5,538 ; DD9.68@623.9,585 623.728,586.112 623.728,587.102 624.053,587.426 v1(624.053,587.68)
  Bottom Layer w0.15: v1(617.804,573.989) 617.804,581.177 624.053,587.426 v1(624.053,587.68)
NetDD9_69: DD9.69 R146.2 | length 57.4
  Top Layer w0.15: v1(622.783,573.938) 619.76,573.938 619.15,573.329 619.15,547.967 619.625,547.493 619.625,543.864 619.15,543.389 619.15,541.947 621.398,539.699 623.57,539.699 625.269,538 R146.2@627.5,538 ; v1(623.387,582.782) 624.55,583.946 DD9.69@624.55,585
  Bottom Layer w0.15: v1(622.783,573.938) 622.783,582.179 v1(623.387,582.782)
NetDD9_70: DD9.70 R145.2 | length 53.2
  Top Layer w0.15: v1(625.2,583.463) DD9.70@625.2,585 ; v1(631.038,578.256) 631.021,578.24 631.021,565.358 631.947,564.432 631.947,562.61 629.158,559.821 629.158,546.303 631.267,544.194 631.267,538.431 631.698,538 R145.2@632.5,538
  Bottom Layer w0.15: v1(625.2,583.463) 625.831,583.463 v1(631.038,578.256)
NetDD9_73: DD9.73 R144.2 | length 37.7
  Top Layer w0.15: R144.2@607.5,575.5 609.6,575.5 611.035,574.065 v1(612.826,574.065) ; v1(624.357,586.823) 624.736,587.202 624.736,589.135 625.094,589.493 626.112,589.493 627.15,588.455 DD9.73@627.15,585
  Bottom Layer w0.15: v1(612.826,574.065) 614.02,572.872 618.973,572.872 619.481,573.38 619.481,581.946 v1(624.357,586.823)
NetDD9_74: DD9.74 R143.2 | length 20
  Top Layer w0.15: R143.2@612.5,575.5 v1(613.816,575.5) ; v1(617.169,577.291) 621.399,577.291 627.8,583.692 DD9.74@627.8,585
  Bottom Layer w0.15: v1(613.816,575.5) 615.608,577.291 v1(617.169,577.291)
NetDD9_75: DD9.75 R142.2 | length 15.6
  Top Layer w0.15: R142.2@617.5,575.5 620.229,575.5 628.45,583.721 DD9.75@628.45,585
NetDD9_76: DD9.76 R141.2 | length 12.8
  Top Layer w0.15: R141.2@622.5,575.5 623.403,575.5 629.1,581.197 DD9.76@629.1,585
NetDD9_78: DD9.78 R140.2 | length 11.6
  Top Layer w0.15: R140.2@627.5,575.5 629.082,575.5 630.4,576.818 DD9.78@630.4,585
NetDD9_79: DD9.79 R139.2 | length 10.4
  Top Layer w0.15: DD9.79@631.05,585 631.05,579.704 631.952,578.802 631.952,575.5 R139.2@632.5,575.5
NetDD9_80: DD9.80 R138.2 | length 12.1
  Top Layer w0.15: DD9.80@631.7,585 631.7,580.923 637.123,575.5 R138.2@637.5,575.5
NetDD9_81: DD9.81 R137.2 | length 16.8
  Top Layer w0.15: DD9.81@636.25,589.55 636.245,589.55 636.245,586.232 642.188,580.288 642.188,575.5 R137.2@642.5,575.5
NetDD9_84: DD9.84 R136.2 | length 43
  Top Layer w0.15: DD9.84@636.25,591.5 637.601,591.5 v1(638.048,591.947) ; v1(664.693,592.201) 664.693,584.708 665.709,583.692 669.746,583.692 670,583.438 R136.2@670,582.5
  Bottom Layer w0.15: v1(638.048,591.947) 638.302,592.201 v1(664.693,592.201)
NetDD9_85: DD9.85 R135.2 | length 46.1
  Top Layer w0.15: v1(633.171,592.836) 633.171,592.76 633.984,591.947 634.975,591.947 635.178,592.15 DD9.85@636.25,592.15 ; v1(665.328,593.649) 665.328,590.093 665.988,589.432 669.34,589.432 670,588.772 R135.2@670,587.5
  Bottom Layer w0.15: v1(633.171,592.836) 633.984,593.649 v1(665.328,593.649)
NetDD9_86: DD9.86 R134.2 | length 39
  Top Layer w0.15: v1(634.837,592.8) DD9.86@636.25,592.8 ; v1(668.503,592.709) 670,592.709 R134.2@670,592.5
  Bottom Layer w0.15: v1(634.837,592.8) 634.492,592.455 634.492,591.845 635.019,591.318 638.586,591.318 638.834,591.566 667.36,591.566 v1(668.503,592.709)
NetDD9_87: DD9.87 R133.2 | length 37.5
  Top Layer w0.15: DD9.87@636.25,593.45 637.667,593.45 v1(638.285,592.832) ; v1(670,594.91) R133.2@670,597.5
  Bottom Layer w0.15: v1(638.285,592.832) 667.414,592.832 669.492,594.91 v1(670,594.91)
NetDD9_88: DD9.88 R132.2 | length 41.7
  Top Layer w0.15: DD9.88@636.25,594.1 638.327,594.233 v1(638.327,595.37) ; v1(668.274,602.209) 670,602.209 R132.2@670,602.5
  Bottom Layer w0.15: v1(638.327,595.37) 637.184,596.513 637.184,598.932 638.124,599.872 665.937,599.872 v1(668.274,602.209)
NetDD9_89: DD9.89 R131.2 | length 46.2
  Top Layer w0.15: v1(634.746,594.75) DD9.89@636.25,594.75 ; v1(670,605.307) R131.2@670,607.5
  Bottom Layer w0.15: v1(634.746,594.75) 634.746,599.592 635.508,600.354 665.047,600.354 v1(670,605.307)
NetDD9_90: DD9.90 R128.2 | length 48.4
  Top Layer w0.15: DD9.90@636.25,595.4 637.286,595.4 638.049,596.163 v1(638.658,596.163) ; v1(665.683,598.5) 665.683,609.981 666.496,610.794 669.188,610.794 670,611.605 R128.2@670,612.5
  Bottom Layer w0.15: v1(638.658,596.163) 641.373,598.879 665.305,598.879 v1(665.683,598.5)
NetDD9_93: DD9.93 R127.2 | length 54.3
  Top Layer w0.15: DD9.93@636.25,597.35 637.42,597.35 v1(637.819,596.951) ; v1(668.503,598.297) 670.789,600.583 670.789,615.163 670,615.951 R127.2@670,617.5
  Bottom Layer w0.15: v1(637.819,596.951) 640.151,599.283 665.917,599.283 666.902,598.297 v1(668.503,598.297)
NetDD9_95: DD9.95 R126.2 | length 25.2
  Top Layer w0.15: DD9.95@636.25,598.65 639.219,598.65 648.818,589.051 649.732,589.051 650.342,588.442 650.342,587.781 652.5,585.622 R126.2@652.5,582.5
NetDD9_96: DD9.96 R125.2 | length 21.7
  Top Layer w0.15: DD9.96@636.25,599.3 639.204,599.3 648.538,589.966 651.052,589.966 652.5,588.518 R125.2@652.5,587.5
NetDD9_97: DD9.97 R124.2 | length 20.8
  Top Layer w0.15: DD9.97@636.25,599.95 640.053,599.95 644.271,595.732 651.764,595.732 652.5,594.996 R124.2@652.5,592.5
NetDD9_98: DD9.98 R123.2 | length 18.5
  Top Layer w0.15: DD9.98@636.25,600.6 651.035,600.6 652.5,599.135 R123.2@652.5,597.5
NetDD9_100: DD9.100 R122.2 | length 17.5
  Top Layer w0.15: DD9.100@636.25,601.9 643.612,601.9 645.393,603.682 650.793,603.682 651.975,602.5 R122.2@652.5,602.5
NetDD9_101: DD9.101 R121.2 | length 19.7
  Top Layer w0.15: DD9.101@636.25,602.55 642.628,602.55 644.369,604.291 651.764,604.291 652.5,605.027 R121.2@652.5,607.5
NetDD9_102: DD9.102 R120.2 | length 20.6
  Top Layer w0.15: DD9.102@636.25,603.2 642.418,603.2 650.85,611.632 652.5,611.632 R120.2@652.5,612.5
NetDD9_103: DD9.103 R119.2 | length 25.3
  Top Layer w0.15: DD9.103@636.25,603.85 641.873,603.85 642.543,604.52 642.543,609.269 648.987,615.713 651.764,615.713 652.5,616.449 R119.2@652.5,617.5
NetDD10_4: DD10.4 R173.1 | length 39.1
  Top Layer w0.15: v1(561.442,523.748) 561.442,537.464 562.204,538.226 564.746,538.226 565,537.972 DD10.4@565,537.54 ; v1(578.733,522.381) 579.5,521.614 R173.1@579.5,520.04
  Bottom Layer w0.15: v1(561.442,523.748) 578.225,523.748 578.733,523.24 v1(578.733,522.381)
NetDD11_3: DD11.3 R172.2 | length 16.4
  Top Layer w0.15: DD11.3@577.5,509.92 577.5,511.161 578.383,512.044 578.383,516.307 580.275,518.199 580.275,522.452 580,522.727 R172.2@580,525.04
NetDD11_4: DD11.4 R174.1 | length 7.6
  Top Layer w0.15: v1(582.462,512.46) 582.5,512.498 R174.1@582.5,515.04
  Bottom Layer w0.15: DD11.4@577.5,512.46 v1(582.462,512.46)
NetDD11_5: DD11.5 R171.2 | length 30.1
  Top Layer w0.15: DD11.5@577.5,515 576.671,514.171 576.671,509.508 577.088,509.091 577.918,509.091 578.351,509.524 578.351,510.61 581.203,513.461 581.203,527.574 580,528.777 R171.2@580,530.04
NetDD12_6: DD12.6 R176.1 | length 33.9
  Top Layer w0.15: R176.1@582.5,505.04 582.5,507.719 590.73,515.948 v1(590.73,516.81)
  Bottom Layer w0.15: DD12.6@577.5,530.04 v1(590.73,516.81)
NetDD12_8: DD12.8 R175.1 | length 34.4
  Top Layer w0.15: R175.1@582.5,510.04 582.5,511.023 587.553,516.075 v1(587.553,530.352)
  Bottom Layer w0.15: DD12.8@577.5,535.12 582.785,535.12 v1(587.553,530.352)
NetDD13_17: DD13.17 R177.1 R178.2 | length 158.2
  Top Layer w0.15: R178.2@575,542.5 574.091,542.5 574.091,550.672 574.726,551.307 575.564,551.307 576.097,550.774 576.206,545.77 R177.1@579.476,542.5 ; v1(578.307,541.332) R177.1@579.476,542.5 ; R177.1@580,542.5 R177.1@579.476,542.5
  Bottom Layer w0.15: v1(578.307,541.332) 578.307,538.912 580.136,537.083 594.004,537.083 602.132,528.955 638.556,528.955 646.532,536.931 696.419,536.931 700,540.512 DD13.17@700,542.3
NetDD13_37: DD13.37 X1.10 | length 8.5
  Top Layer w0.15: X1.10@705,565 707.5,562.5 DD13.37@707.5,557.5
NetDD13_38: DD13.38 X1.11 | length 8.5
  Top Layer w0.15: X1.11@702.5,565 702.5,560.818 705,558.318 DD13.38@705,557.5
NetDD13_39: DD13.39 X1.12 | length 8.5
  Top Layer w0.15: X1.12@700,565 700.761,564.239 700.761,559.239 DD13.39@702.5,557.5
NetDD13_40: DD13.40 X1.13 | length 8.5
  Top Layer w0.15: X1.13@697.5,565 698.83,563.67 698.83,558.67 DD13.40@700,557.5
NetDD13_41: DD13.41 X1.14 | length 8.5
  Top Layer w0.15: X1.14@695,565 697.5,562.5 DD13.41@697.5,557.5
NetDD13_42: DD13.42 X1.15 | length 8.5
  Top Layer w0.15: DD13.42@695,557.5 v1(695,562.5)
  Bottom Layer w0.15: X1.15@692.5,565 v1(695,562.5)
NetDD13_45: DD13.45 X1.16 | length 8.5
  Top Layer w0.15: DD13.45@687.5,557.5 690,560 X1.16@690,565
NetDD13_46: DD13.46 X1.17 | length 8.5
  Top Layer w0.15: DD13.46@685,557.5 687.5,560 X1.17@687.5,565
NetDD13_47: DD13.47 X1.18 | length 8.5
  Top Layer w0.15: DD13.47@682.5,557.5 683.359,558.359 683.359,563.359 X1.18@685,565
NetDD13_48: DD13.48 X1.19 | length 8.5
  Top Layer w0.15: DD13.48@680,557.5 682.5,560 X1.19@682.5,565
NetDD14_17: DD14.17 R179.1 R180.2 | length 151.9
  Top Layer w0.15: DD14.17@627.5,542.5 627.5,556.177 628.752,557.428 628.752,560.072 631.543,562.864 631.543,563.675 629.488,565.73 v1(629.488,573.888) ; v1(705.561,577.113) 705.561,599.034 711.53,605.003 711.53,607 R180.2@712.5,607 R179.1@717.5,607
  Bottom Layer w0.15: v1(629.488,573.888) 642.899,573.888 646.43,577.418 687.883,577.418 690.575,574.726 703.174,574.726 v1(705.561,577.113)
NetDD14_37: DD14.37 X1.20 | length 58.3
  Top Layer w0.15: v1(634.171,567.868) 633.4,567.097 633.4,559.3 DD14.37@635,557.7
  Bottom Layer w0.15: v1(634.171,567.868) 634.352,567.687 662.722,567.687 662.903,567.868 677.132,567.868 X1.20@680,565
NetDD14_38: DD14.38 X1.21 | length 54.7
  Top Layer w0.15: DD14.38@632.5,557.7 632.5,559.315 632.789,559.604 632.789,566.773 v1(632.76,566.801)
  Bottom Layer w0.15: v1(632.76,566.801) 669.798,566.801 670.357,566.242 676.258,566.242 X1.21@677.5,565
NetDD14_39: DD14.39 X1.22 | length 51.3
  Top Layer w0.15: DD14.39@630,557.7 630,559.744 v1(631.673,561.416)
  Bottom Layer w0.15: v1(631.673,561.416) 633.857,563.601 652.043,563.601 654.372,565.929 665.937,565.929 666.547,565.319 666.547,564.388 666.877,564.058 674.058,564.058 X1.22@675,565
NetDD14_40: DD14.40 X1.23 | length 64.9
  Top Layer w0.15: v1(671.246,554.99) 671.246,563.746 X1.23@672.5,565
  Bottom Layer w0.15: DD14.40@627.5,557.7 626.578,558.622 624.484,558.622 624.154,558.292 624.154,555.676 624.84,554.99 660.965,554.99 661.325,555.35 665.334,555.35 665.942,554.742 670.998,554.742 v1(671.246,554.99)
NetDD14_41: DD14.41 X1.24 | length 53
  Top Layer w0.15: v1(666.42,556.184) 667.436,556.184 670,558.748 X1.24@670,565
  Bottom Layer w0.15: DD14.41@625,557.7 626.323,556.377 629.158,556.377 629.474,556.062 660.157,556.062 660.279,556.184 v1(666.42,556.184)
NetDD14_42: DD14.42 X1.25 | length 49.1
  Top Layer w0.15: DD14.42@622.5,557.7 624.895,560.095 627.199,560.095 v1(630.602,563.499)
  Bottom Layer w0.15: v1(630.602,563.499) 631.11,564.007 651.307,564.007 653.633,566.333 666.167,566.333 X1.25@667.5,565
NetDD14_45: DD14.45 X1.26 | length 53.6
  Bottom Layer w0.15: DD14.45@615,557.7 617.348,560.048 629.105,560.048 629.832,559.321 634.293,559.321 635.213,560.241 660.241,560.241 X1.26@665,565
NetDD14_46: DD14.46 X1.27 | length 53.6
  Bottom Layer w0.15: DD14.46@612.5,557.7 615.252,560.452 629.509,560.452 630.236,559.725 634.114,559.725 635.221,560.832 658.332,560.832 X1.27@662.5,565
NetDD14_47: DD14.47 X1.28 | length 53.6
  Bottom Layer w0.15: DD14.47@610,557.7 613.156,560.856 629.913,560.856 630.64,560.129 633.883,560.129 634.99,561.236 656.236,561.236 X1.28@660,565
NetDD14_48: DD14.48 X1.29 | length 53.6
  Bottom Layer w0.15: DD14.48@607.5,557.7 611.078,561.278 630.299,561.278 631.044,560.533 633.115,560.533 634.222,561.64 654.14,561.64 X1.29@657.5,565
NetDD15_3: DD15.3 L24.2 | length 12.5
  Top Layer w0.15: DD15.3@641.9,524.96 642.928,524.96 644.144,526.176 644.144,527.294 642,529.438 L24.2@642,535
NetDD15_11: DD15.11 R196.1 R197.1 | length 65.1
  Top Layer w0.15: R196.1@592.5,535 592.506,535 v1(592.506,529.272) ; v1(635.229,522) R197.1@637.5,522 639.551,522 640.613,523.062 643.175,523.062 643.803,523.69 DD15.11@647.5,523.69
  Bottom Layer w0.15: v1(592.506,529.272) 592.506,528.193 598.699,522 v1(635.229,522)
NetDD15_13: DD15.13 DD16.9 R188.1 | length 61.5
  Top Layer w0.15: DD15.13@647.5,526.23 649.242,526.23 v1(649.453,526.44) ; v1(685.673,531.114) 685.673,531.876 686.297,532.5 R188.1@687.5,532.5 ; DD16.9@697.7,524.65 v1(697.7,531.114)
  Bottom Layer w0.15: v1(649.453,526.44) 654.126,531.114 v1(685.673,531.114) v1(697.7,531.114)
NetDD16_1: DD16.1 R192.1 | length 19.2
  Top Layer w0.15: DD16.1@702.9,524.65 702.9,525.78 710.418,533.298 713.994,533.298 714.792,532.5 R192.1@717.5,532.5
NetDD16_6: DD16.6 R202.1 | length 16.5
  Top Layer w0.15: R202.1@692.5,532.5 694.792,532.5 696.283,531.008 696.283,523.748 696.835,523.196 699.352,523.196 699.65,523.494 DD16.6@699.65,524.65
NetDD16_15: DD16.15 R185.2 R198.2 | length 44.1
  Top Layer w0.15: v1(690.169,517.5) DD16.15@692.5,517.5 ; R198.2@695,495.5 696.751,495.5 697.459,494.792 697.459,491.668 697.992,491.134 699.084,491.134 699.694,491.744 699.694,492.5 R185.2@700,492.5 701.11,492.5 701.37,492.76 701.37,497.662 v1(702.92,499.212)
  Bottom Layer w0.15: v1(690.169,517.5) 699.514,508.155 699.514,502.617 v1(702.92,499.212)
NetDD16_16: DD16.16 R186.2 R200.2 | length 39.9
  Top Layer w0.15: R186.2@685,492.5 688.885,492.5 ; v1(688.467,516.85) DD16.16@692.5,516.85 ; R200.2@690,492.5 688.885,492.5 ; v1(691.845,501.599) 691.566,501.32 691.566,498.412 691.388,498.234 689.576,498.234 688.041,496.699 688.041,493.344 688.885,492.5
  Bottom Layer w0.15: v1(688.467,516.85) 689.726,516.85 693.496,513.08 693.496,503.25 v1(691.845,501.599)
NetDD16_23: DD16.23 R214.2 R231.1 | length 57.9
  Top Layer w0.15: R231.1@647.5,510 v1(647.5,512.474) ; v1(683.768,511.429) 684.619,511.429 685.064,510.984 ; DD16.23@698.35,509.7 698.35,510.794 698.071,511.073 685.152,511.073 685.064,510.984 ; 685.064,510.984 R214.2@685,510 685,510.921 685.064,510.984
  Bottom Layer w0.15: v1(647.5,512.474) 648.389,513.363 662.378,513.363 664.312,511.429 v1(683.768,511.429)
NetDD16_24: DD16.24 R216.2 R232.1 | length 91.2
  Top Layer w0.15: v1(674.472,494.157) 674.472,495.5 R232.1@675,495.5 ; DD16.24@699,509.7 699,511.556 699.508,512.064 708.324,512.064 709.359,513.099 715.143,513.099 716.686,511.556 716.686,501.396 v1@719.633,498.45 ; v1(719.582,498.399) v1@719.633,498.45 ; R216.2@725,495.5 722.582,495.5 v1@719.633,498.45
  Bottom Layer w0.15: v1(674.472,494.157) 684.211,494.157 685.038,494.984 689.067,494.984 689.894,494.157 708.685,494.157 712.927,498.399 v1(719.582,498.399)
NetDD16_40: DD16.40 R207.2 R208.1 | length 129.7
  Top Layer w0.15: R207.2@617.5,512.5 617.804,512.5 617.804,513.41 v1(620.979,516.585) ; DD16.40@707.45,520.1 709.793,520.1 716.947,527.253 ; v1(714.68,525.272) 716.661,527.253 716.947,527.253 ; R208.1@719.5,527.5 719.5,527.253 716.947,527.253
  Bottom Layer w0.15: v1(620.979,516.585) 632.816,516.585 651.586,535.356 704.596,535.356 v1(714.68,525.272)
NetDD16_42: R189.1 R204.2 | length 6.2
  Top Layer w0.15: R189.1@627.5,509.5 628.498,509.5 631.498,512.5 R204.2@632.5,512.5
NetDD16_43: R190.1
NetDD16_44: R191.1
NetDD17_5: DD17.5 R235.2 | length 56.6
  Top Layer w0.15: DD17.5@667.5,512.46 691.211,512.46 691.954,511.717 693.826,511.717 695.001,512.892 706.853,512.892 707.65,513.69 720.395,513.69 721.584,512.5 R235.2@722.5,512.5
NetDD17_6: DD17.6 R234.2 | length 56.4
  Top Layer w0.15: v1(712.826,517.804) 719.5,517.804 R234.2@719.5,517.5
  Bottom Layer w0.15: DD17.6@667.5,515 682.538,515 686.308,518.77 703.453,518.77 707.009,515.214 710.235,515.214 v1(712.826,517.804)
NetL2_2: L2.2 R9.1 VD4.2 | length 123.8
  Top Layer w0.15: L2.2@586,700 586,696.7 587.781,694.919 587.781,661.822 v1(587.527,661.568) ; VD4.2@622.5,642.5 619.259,642.5 618.592,641.833 617.144,641.833 616.864,642.112 616.864,644.068 619.658,646.862 628.675,646.862 629.869,648.056 629.869,658.532 629.401,659 v1(629.401,660.984) 632.5,664.083 R9.1@632.5,665
  Bottom Layer w0.15: v1(587.527,661.568) 587.697,661.399 623.549,661.399 625.577,659.371 626.847,659.371 628.46,660.984 v1(629.401,660.984)
NetL3_2: L3.2 R10.1 VD7.2 | length 158.2
  Top Layer w0.15: L3.2@560,652.5 561.061,652.5 v1(561.061,654.914) ; v1(635.254,657.987) 637.54,660.273 637.54,668.02 638.048,668.528 642.315,668.528 642.823,669.036 ; R10.1@635.5,670 635.5,669.163 635.627,669.036 642.823,669.036 ; VD7.2@645,717.5 644.043,717.5 643.331,716.788 643.331,669.544 642.823,669.036
  Bottom Layer w0.15: v1(561.061,654.914) 572.872,654.914 577.215,659.257 614.02,659.257 619.404,653.872 624.992,653.872 629.107,657.987 v1(635.254,657.987)
NetL4_2: L4.2 R15.2 R19.1 | length 118.2
  Top Layer w0.15: L4.2@567.5,652.5 569.62,652.5 v1(569.62,658.622) ; R19.1@617.5,652.5 619.252,652.5 619.735,652.983 v1(619.735,654.533) ; R15.2@632.5,695 632.5,692.215 629.615,689.331 629.615,671.144 633.705,667.055 v1(633.705,663.194)
  Bottom Layer w0.15: v1(569.62,658.622) 571.221,660.223 614.044,660.223 v1(619.735,654.533) 624.022,654.533 628.524,659.034 630.53,659.034 633.705,662.209 v1(633.705,663.194)
NetL5_2: L5.2 R16.2 R20.1 | length 114.6
  Top Layer w0.15: L5.2@575,652.5 v1(577.926,652.5) ; v1(618.979,649.91) 621.569,652.5 621.665,652.5 ; R20.1@622.5,652.5 621.665,652.5 ; v1(622.833,698.297) 621.64,697.103 621.64,679.583 621.95,679.272 621.95,678.713 622.396,678.268 622.396,669.217 621.425,668.247 621.425,652.74 621.665,652.5 ; v1(632.282,698.297) 632.5,698.515 R16.2@632.5,700
  Bottom Layer w0.15: v1(577.926,652.5) 577.926,647.065 578.976,646.015 584.293,646.015 584.489,645.819 604.638,645.819 608.729,649.91 v1(618.979,649.91) ; v1(622.833,698.297) v1(632.282,698.297)
NetL6_2: L6.2 R17.2 R21.1 | length 85.7
  Top Layer w0.15: v1(581.406,658.216) 581.406,676.326 585.038,679.958 585.038,687.324 L6.2@582.5,687.5 ; v1(607.466,653.39) 607.5,653.356 R17.2@607.5,652.5 608.584,652.5 611.327,649.757 611.327,648.97 611.581,648.716 619.123,648.716 620.943,650.536 623.267,650.536 625.231,652.5 R21.1@627.5,652.5
  Bottom Layer w0.15: v1(581.406,658.216) 586.232,653.39 v1(607.466,653.39)
NetR209_2: R209.2 VT1.3 | length 10.6
  Top Layer w0.15: R209.2@710,502.5 711.708,502.5 715,505.792 VT1.3@715,510
NetR218_2: R218.2 R226.1 VT1.2 | length 61.4
  Top Layer w0.15: R218.2@674.5,510 674.5,509.981 668.553,509.981 666.671,511.864 666.671,512.956 667.004,513.289 676.083,513.289 R226.1@677.5,514.706 ; R226.1@677.5,515 R226.1@677.5,514.706 ; v1(678.586,514.325) 678.205,514.706 R226.1@677.5,514.706 ; VT1.2@710.75,508.75 v1(710.75,510.032)
  Bottom Layer w0.15: v1(678.586,514.325) 682.854,514.325 686.867,518.338 702.444,518.338 v1(710.75,510.032)
NetR231_2: R231.2 VT2.1 | length 5.6
  Top Layer w0.15: VT2.1@640,512.2 641.939,510.261 644.5,510.261 R231.2@644.5,510
NetR232_2: R232.2 VT4.1 | length 14.2
  Top Layer w0.15: VT4.1@672.5,505 673.608,503.892 673.608,492.805 673.913,492.5 R232.2@675,492.5
NetR233_2: R233.2 VT3.1 | length 10
  Top Layer w0.15: VT3.1@681.25,502.5 682.435,502.5 683.235,501.701 687.511,501.701 689.712,499.5 R233.2@690,499.5
NetR236_1: R236.1 R237.1 VT3.3 | length 39.4
  Top Layer w0.15: v1(677,501.371) VT3.3@677,503.75 ; v1(704.393,496.468) R237.1@705.361,495.5 ; R237.1@705,495.5 R237.1@705.361,495.5 ; R236.1@710,492.5 708.993,492.5 705.993,495.5 R237.1@705.361,495.5
  Bottom Layer w0.15: v1(677,501.371) 690.543,501.371 690.962,500.952 699.909,500.952 v1(704.393,496.468)
NetR238_1: R238.1 VT4.3 | length 9.7
  Top Layer w0.15: R238.1@665,507.5 v1(667.2,507.5)
  Bottom Layer w0.15: v1(667.2,507.5) VT4.3@672.5,502.2
NetR239_1: R239.1 VT2.3 | length 5.7
  Top Layer w0.15: v1(642.275,515) 643.128,514.147 644.5,514.147 R239.1@644.5,515
  Bottom Layer w0.15: VT2.3@640,515 v1(642.275,515)